# Altium PCB SPEC_A7_Management.PCBDOC (part 3 of 4)
Units mm, origin at the board's own origin, x right, y up, seen from the top; angles counter-clockwise.
Board outline 141.1 x 65.84 mm, 4 copper layers (Top Layer, Layer 1, Layer 2, Bottom Layer), stack 1.566 mm thick; 177 components, 176 nets, 698 pads, 409 vias.
Unrouted connection lines stored in the file: 4.
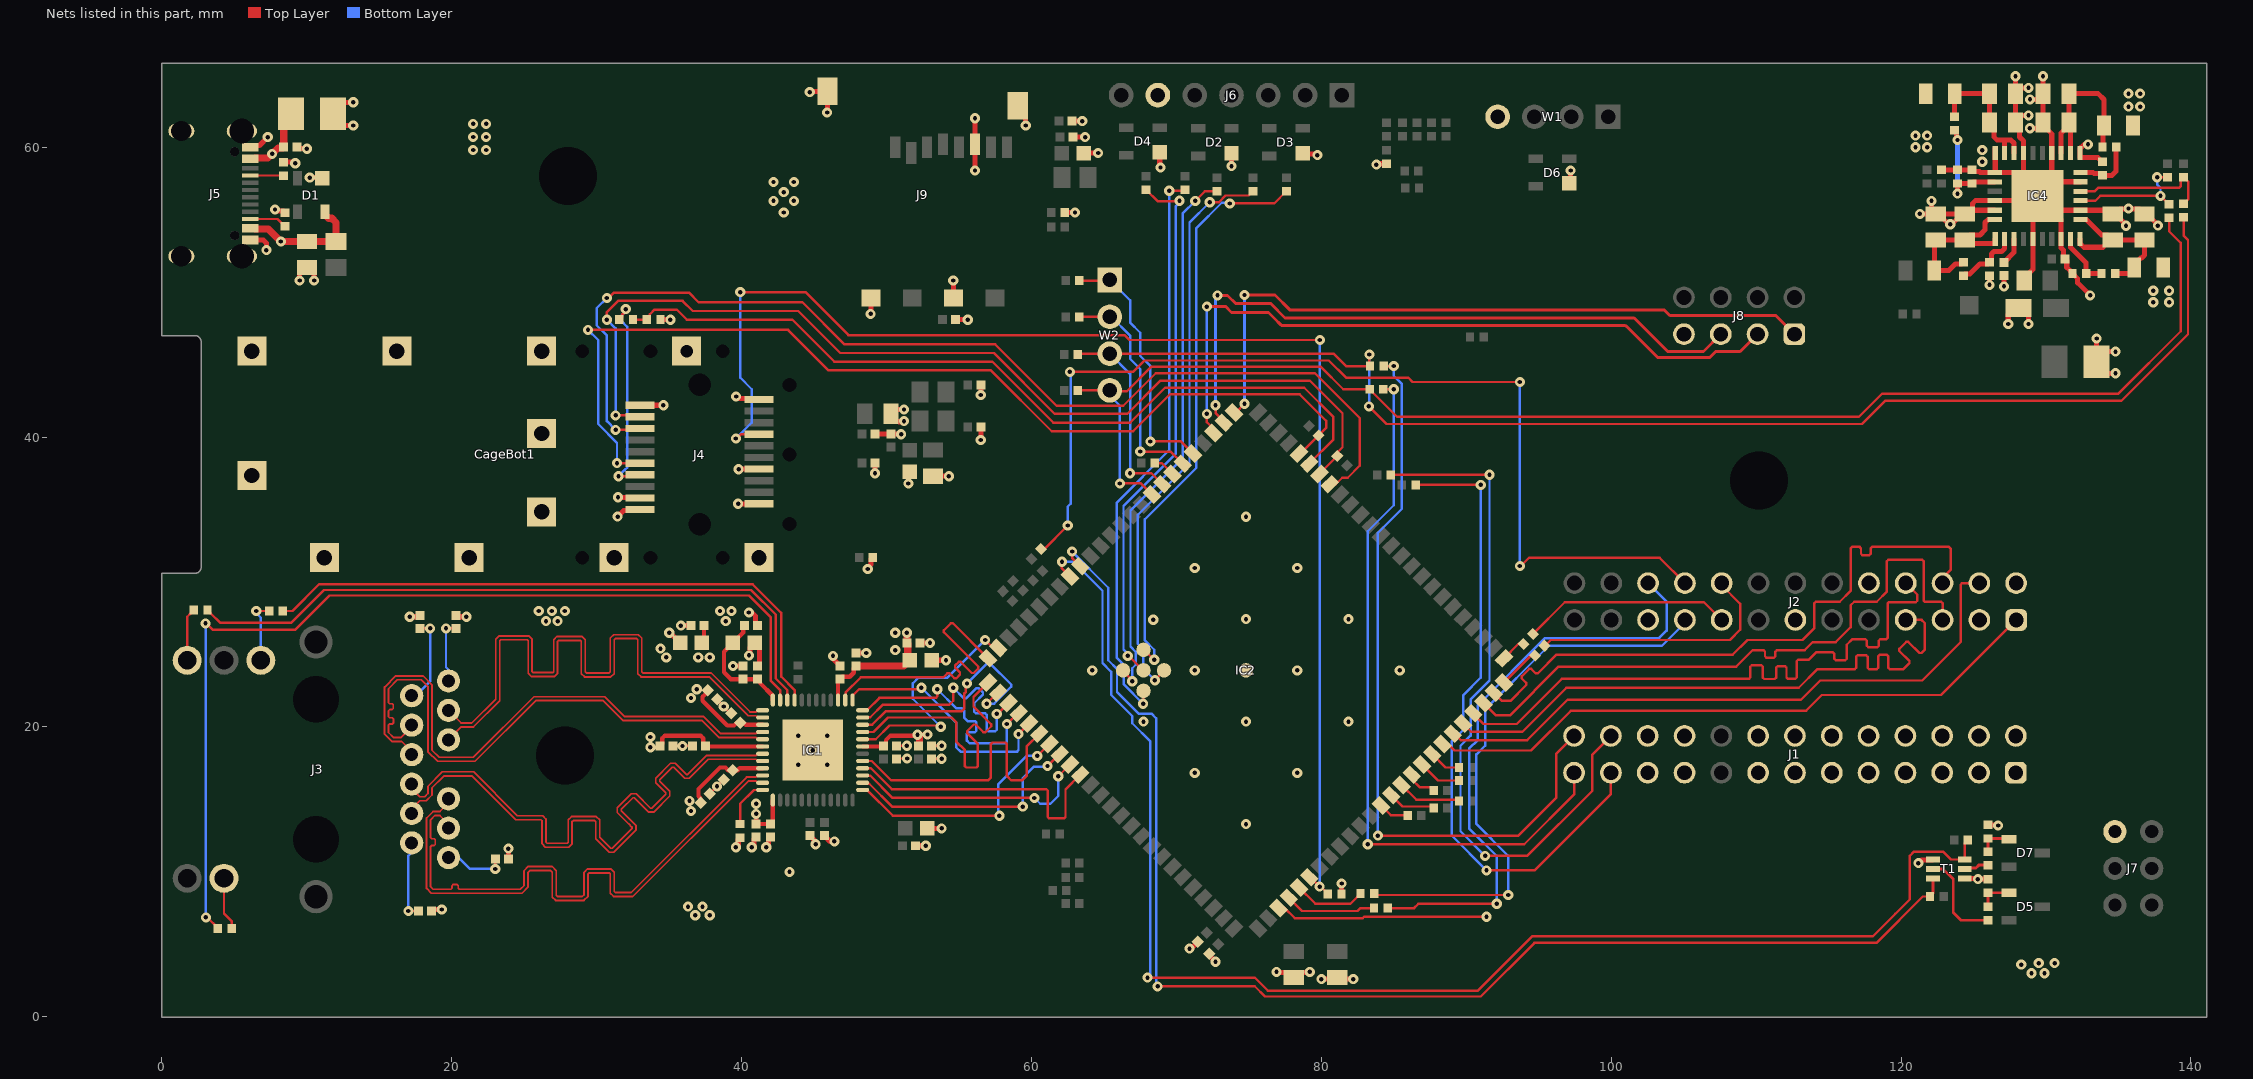
[diagram p4: the nets of this part, all layers, seen from the top]

## Via types
v1: diameter 0.7, hole 0.3, Top Layer to Bottom Layer, tented both sides, 409 vias

## Nets (pads, with @x,y where several pads share a name; then routed paths per layer and width w, separated by ;. In a path a pad name is that pad's centre, name@x,y a point inside that pad or via, vN(x,y) a via of type N, cw(c..) or ccw(c..) an arc to the next point about the centre after c; other vN are vias at no path point) (continued)
ENET1_RX_CLK: IC1.32 IC2.24 | length 17
  Top Layer w0.166: IC1.32@48.35,19.15 49.254,19.15 50.204,20.1 53.647,20.1 v1(53.739,20.008) ; v1(56.8,26) 57.362,25.438 IC2.24@57.706,25.438
  Bottom Layer w0.166: v1(53.739,20.008) 51.8,21.947 51.8,23 52.2,23.4 54.2,23.4 v1(56.8,26)
ENET1_RX_CTRL: IC1.38 IC2.25 | length 20
  Top Layer w0.166: IC1.38@47.15,21.85 47.176,21.876 47.176,22.374 48.227,23.425 53.917,23.425 54.192,23.701 54.33,23.701 54.677,23.354 54.814,23.354 55.067,23.606 55.067,23.744 54.72,24.09 54.72,24.228 54.976,24.484 55.113,24.484 55.88,23.718 56.018,23.718 56.326,24.026 56.326,24.164 53.957,26.532 53.957,26.67 54.44,27.152 54.577,27.152 IC2.25@56.999,24.731
ENET1_RXD0: IC1.33 IC2.26 | length 20.2
  Top Layer w0.166: IC1.33@48.35,19.65 49.09,19.65 50.092,20.653 54.477,20.653 54.8,20.329 54.8,18.997 55.4,18.397 55.4,17.3 55.5,17.2 56.2,17.2 56.3,17.3 56.3,18.823 55.555,19.568 55.555,19.706 56.014,20.165 56.152,20.165 56.68,19.637 56.817,19.637 57.221,20.041 57.221,20.179 56,21.4 56,22.071 IC2.26@56.999,23.069
ENET1_RXD1: IC1.34 IC2.27 | length 17
  Top Layer w0.166: IC1.34@48.35,20.15 49.003,20.15 49.926,21.073 55.179,21.073 55.37,21.264 55.37,22.314 55.453,22.397 55.453,22.907 v1(55.543,22.997) ; v1(56.9,21.6) 57.662,22.362 IC2.27@57.706,22.362
  Bottom Layer w0.166: v1(55.543,22.997) 56.963,24.417 57.101,24.417 58.6,22.917 58.6,22.78 57.421,21.6 v1(56.9,21.6)
ENET1_RXD2: IC1.35 IC2.28 | length 17
  Top Layer w0.166: IC1.35@48.35,20.65 48.363,20.663 48.869,20.663 49.742,21.536 54.333,21.536 54.6,21.802 v1(54.6,22.7) ; v1(57.6,20.9) 57.658,20.9 IC2.28@58.413,21.655
  Bottom Layer w0.166: v1@54.602,22.698 55.341,21.959 55.478,21.959 56.199,22.68 56.336,22.68 56.651,22.365 56.651,22.227 56.052,21.628 56.052,21.036 56.149,20.938 56.803,20.938 56.9,20.841 56.9,19.797 56.997,19.7 57.5,19.7 57.6,19.8 v1(57.6,20.9)
ENET1_RXD3: IC1.36 IC2.29 | length 17
  Top Layer w0.166: IC1.36@48.35,21.15 48.65,21.15 49.5,22 53.403,22 53.5,22.097 v1(53.5,22.6) ; v1(58.3,20.2) 59.048,20.948 IC2.29@59.12,20.948
  Bottom Layer w0.166: v1(53.5,22.6) 54.799,21.301 55.167,21.301 55.364,21.104 55.364,20.617 55.582,20.4 56.103,20.4 56.2,20.303 56.2,19.74 56.103,19.642 55.635,19.642 55.538,19.545 55.538,19.057 55.719,18.876 58.203,18.876 58.3,18.973 v1(58.3,20.2)
ENET1_TX_CLK: IC1.29 IC2.31 | length 20.1
  Top Layer w0.166: IC1.29@48.35,17.65 48.976,17.65 50.317,16.31 57,16.31 57.2,16.51 57.2,18.827 57.297,18.924 58.203,18.924 58.3,18.827 58.3,16.61 58.6,16.31 59.35,16.31 59.68,16.64 59.68,18.68 IC2.31@60.534,19.534
ENET1_TX_CTRL: IC1.37 IC2.30 | length 17
  Top Layer w0.166: IC1.37@47.65,21.85 47.65,22.15 48.1,22.6 52.3,22.6 v1(52.4,22.7) ; v1(59.1,19.5) 59.1,19.514 IC2.30@59.827,20.241
  Bottom Layer w0.166: v1(52.4,22.7) 54.8,20.3 54.8,18.6 55.1,18.3 59.003,18.3 59.1,18.397 v1(59.1,19.5)
ENET1_TXD0: IC1.28 IC2.35 | length 19.9
  Top Layer w0.166: IC1.28@48.35,17.15 48.912,17.15 50.358,15.704 61.022,15.704 61.119,15.607 61.119,13.785 61.217,13.688 62.245,13.688 62.343,13.785 62.343,15.685 IC2.35@63.363,16.705
ENET1_TXD1: IC1.27 IC2.34 | length 17
  Top Layer w0.166: IC1.27@48.35,16.65 48.363,16.637 48.869,16.637 50.407,15.099 60.199,15.099 v1(60.2,15.1) ; v1(61.843,16.6) IC2.34@62.655,17.412
  Bottom Layer w0.166: v1(60.2,15.1) 60.6,14.7 61.3,14.7 61.843,15.243 v1(61.843,16.6)
ENET1_TXD2: IC1.26 IC2.33 | length 17
  Top Layer w0.166: IC1.26@48.35,16.15 48.686,16.15 48.753,16.083 48.802,16.083 50.399,14.485 59.385,14.485 v1(59.4,14.5) ; v1(61.1,17.3) 61.919,18.119 IC2.33@61.948,18.119
  Bottom Layer w0.166: v1(59.4,14.5) 59.4,16.477 60.18,17.257 61.057,17.257 v1(61.1,17.3)
ENET1_TXD3: IC1.25 IC2.32 | length 17.1
  Top Layer w0.166: IC1.25@48.35,15.65 48.394,15.606 48.694,15.606 50.43,13.87 v1(57.783,13.87) ; v1(60.4,18) 61.227,18.827 IC2.32@61.241,18.827
  Bottom Layer w0.166: v1(57.783,13.87) 57.694,13.958 57.694,16.039 59.656,18 v1(60.4,18)
ENET2_MDC: IC2.76 R62.2 | length 2.2
  Top Layer w0.166: IC2.76@92.592,24.308 92.592,24.721 93.606,25.735 93.614,25.735 93.629,25.749 93.921,25.749 R62.2@93.935,25.735
ENET2_MDIO: IC2.75 R61.2 | length 3.3
  Top Layer w0.166: IC2.75@93.014,23.069 IC2.75@92.601,23.069 94.468,24.935 R61.2@94.735,24.935
ENET2_RX_CLK: IC2.70 J2.4 | length 43.3
  Top Layer w0.166: IC2.70@89.066,19.534 89.172,19.534 89.615,19.09 94.211,19.09 96.993,21.872 113.099,21.872 114.428,23.2 121.46,23.2 124.121,25.861 124.121,29.824 124.218,29.921 J2.4@125.405,29.921
ENET2_RX_CTRL: IC2.69 J2.1 | length 43.5
  Top Layer w0.166: IC2.69@88.359,18.827 88.738,18.827 89.19,18.374 94.477,18.374 97.22,21.116 113.45,21.116 114.533,22.2 122.764,22.2 J2.1@127.945,27.381
ENET2_RXD0: IC2.74 J2.6 | length 43.5
  Top Layer w0.166: IC2.74@91.894,22.362 92.456,21.8 93.045,21.8 94.141,22.897 94.141,23.034 93.831,23.345 93.831,23.483 94.349,24.001 94.486,24.001 94.797,23.69 94.935,23.69 96.236,24.991 108.391,24.991 109.4,26 113.2,26 114.021,26.821 114.021,28.543 114.118,28.64 115.771,28.64 116.521,29.39 116.521,32.323 116.618,32.421 117.142,32.421 117.24,32.323 117.24,31.952 117.337,31.854 117.803,31.854 117.9,31.952 117.9,32.321 118,32.421 123.313,32.421 123.419,32.315 123.419,30.836 122.865,30.282 J2.6@122.865,29.921
ENET2_RXD1: IC2.73 J2.5 | length 43.4
  Top Layer w0.166: IC2.73@91.187,21.655 92.042,20.8 93.009,20.8 96.373,24.164 108.627,24.164 109.753,25.29 110.518,25.29 110.616,25.192 110.616,24.881 110.713,24.783 111.231,24.783 111.328,24.881 111.328,25.192 111.425,25.29 113.348,25.29 113.898,25.84 115.483,25.84 116.521,26.878 116.521,28.393 116.768,28.64 118.321,28.64 119.021,29.34 119.021,31.435 119.118,31.533 121.465,31.533 121.562,31.435 121.562,28.724 121.66,28.627 122.768,28.627 122.865,28.53 J2.5@122.865,27.381
ENET2_RXD2: IC2.72 J2.8 | length 43.3
  Top Layer w0.166: IC2.72@90.48,20.948 90.48,20.909 91.185,20.204 93.484,20.204 96.593,23.313 109.503,23.313 109.6,23.41 109.6,24.158 109.697,24.255 110.365,24.255 110.463,24.158 110.463,23.402 110.56,23.304 111.284,23.304 111.381,23.402 111.381,24.091 111.479,24.188 112,24.188 112.097,24.091 112.097,23.413 112.195,23.316 112.703,23.316 112.8,23.413 112.8,24.526 112.897,24.624 113.613,24.624 114.13,25.14 115.306,25.14 115.403,25.043 115.403,24.697 115.5,24.6 116.156,24.6 116.253,24.697 116.253,25.674 116.619,26.04 117.546,26.04 117.643,25.943 117.643,25.597 117.741,25.5 118.367,25.5 118.464,25.597 118.464,25.943 118.561,26.04 118.976,26.04 119.074,26.137 119.074,28.515 119.171,28.612 121.017,28.612 121.114,28.71 121.114,29.132 J2.8@120.325,29.921
ENET2_RXD3: IC2.71 J2.7 | length 43.3
  Top Layer w0.166: IC2.71@89.773,20.241 90.347,19.666 93.873,19.666 96.907,22.7 112.943,22.7 114.231,23.987 116.8,23.987 116.897,24.085 116.897,24.852 116.994,24.949 117.597,24.949 117.694,24.852 117.694,24.085 117.791,23.987 118.317,23.987 118.414,24.085 118.414,24.87 118.512,24.967 119.027,24.967 119.125,24.87 119.125,24.085 119.222,23.987 120.167,23.987 120.587,24.407 120.587,24.545 119.882,25.25 119.882,25.388 120.364,25.87 120.502,25.87 121.268,25.103 121.406,25.103 121.65,25.348 121.65,27.15 121.419,27.381 J2.7@120.325,27.381
  Bottom Layer w0.166: J2.7@120.325,27.381 J2.7@120.336,27.371
ENET2_TX_CLK: IC2.63 R70.2 | length 2.1
  Top Layer w0.166: IC2.63@84.116,14.584 84.8,13.9 R70.2@85.96,13.9
ENET2_TX_CTRL: IC2.68 R69.2 | length 2.2
  Top Layer w0.166: IC2.68@87.652,18.119 88.571,17.2 R69.2@89.5,17.2
ENET2_TXD0: IC2.67 R60.2 | length 3
  Top Layer w0.166: IC2.67@86.945,17.412 88.057,16.3 R60.2@89.5,16.3
ENET2_TXD1: IC2.66 R66.2 | length 2.2
  Top Layer w0.166: IC2.66@86.237,16.705 86.237,16.386 86.796,15.827 87.553,15.827 87.76,15.62 R66.2@87.76,15.6
ENET2_TXD2: IC2.65 R67.2 | length 4.4
  Top Layer w0.166: IC2.65@85.53,15.998 86.549,14.98 89.42,14.98 R67.2@89.5,14.9
ENET2_TXD3: IC2.64 R68.2 | length 3.3
  Top Layer w0.166: IC2.64@84.823,15.291 85.604,14.51 87.65,14.51 R68.2@87.76,14.4
EXT_CLK_0_N: J1.4
EXT_CLK_0_P: J1.1
EXT_CLK_1_N: J1.5
EXT_CLK_1_P: J1.6
EXT_CLK_4_N: J1.22
EXT_CLK_4_P: J1.19
EXT_CLK_5_N: J1.16
EXT_CLK_5_P: J1.13
EXT_CLK_6_N: J1.10
EXT_CLK_6_P: J1.7
EXT_CLK_9_N: J1.11
EXT_CLK_9_P: J1.12
FLASH_UP_EN: IC2.3 J8.3 | length 49
  Top Layer w0.166: v1(72.1,41.6) 72.1,41.025 72.555,40.57 IC2.3@72.555,40.287
  Top Layer w0.2: v1(72.1,49) 73.4,49 73.8,48.6 76.35,48.6 76.776,48.174 77.202,47.748 77.26,47.69 100.927,47.69 cw(c100.927,47.49) 101.069,47.631 103.209,45.491 106.8,45.491 107.208,45.9 108.9,45.9 J8.3@110.1,47.1
  Bottom Layer w0.166: v1(72.1,41.6) v1(72.1,49)
FPGA_DONE: IC2.2 J8.5 | length 45.9
  Top Layer w0.166: v1(72.7,42.2) 72.7,41.651 73.262,41.089 IC2.2@73.262,40.994
  Top Layer w0.2: v1(72.838,49.775) 73.525,49.775 74.092,49.208 76.508,49.208 77.501,48.215 101.585,48.215 103.9,45.9 106.36,45.9 J8.5@107.56,47.1
  Bottom Layer w0.2: v1(72.7,42.2) 72.7,49.501 72.838,49.64 v1(72.838,49.775)
FPGA_INIT_B: IC2.1 J8.1 | length 47.6
  Top Layer w0.166: IC2.1@73.969,41.701 74.101,41.701 v1(74.7,42.3)
  Top Layer w0.2: v1(74.697,49.808) 76.792,49.808 77.818,48.782 103.648,48.782 104.046,48.383 111.357,48.383 J8.1@112.64,47.1
  Bottom Layer w0.2: v1(74.697,49.808) 74.7,49.805 v1(74.7,42.3)
GND: C1.1 C2.1 C3.1 C4.1 C5.1 C6.1 C7.1 C8.1 C9.1 C10.1 C11.1 C12.1 C13.1 C14.1 C15.1 C16.1 C17.1 C18.1 C19.1 C20.1 C21.1 C22.1 C23.1 C24.1 C25.1 C26.1 C27.1 C28.1 C29.1 C30.1 C31.1 C32.1 C33.1 C34.1 C35.1 C36.1 C37.1 C38.1 C39.1 C40.1 C41.2 C42.1 C43.1 C44.1 C45.1 C46.1 C47.1 C48.1 C49.2 C50.2 C51.1 C52.1 C53.1 C54.1 C55.1 C56.1 C57.1 C58.1 C59.1 C60.1 C61.1 C62.1 CageBot1.21 CageBot1.22 CageBot1.23 CageBot1.24 CageBot1.25 CageBot1.26 CageBot1.27 CageBot1.28 CageBot1.29 CageBot1.30 CageBot1.31 D1.1 D2.1 D3.1 D4.1 D6.1 IC1.49 IC2.101 IC4.2 IC4.5 IC4.7 IC4.10 IC4.13 IC4.16 IC4.17 IC4.20 IC4.21 IC4.27 IC4.30 IC4.33 J1.2 J1.3 J1.8 J1.9 J1.14 J1.15 J1.20 J1.21 J2.2 J2.3 J2.10 J2.13 J2.21 J4.1 J4.9 J4.10 J4.11 J4.14 J4.20 J5.1 J5.2 J5.3 J5.4 J5.A1-B12 J5.B1-A12 J6.6 J7.6 J8.7 J9.6 J9.9 R5.2 R10.1 R11.1 R12.1 R13.2 R14.2 R33.1 R39.1 R40.1 R41.1 R46.1 R49.1 R52.1 R74.1 R77.1 R78.2 T1.1 T1.4 W1.4 | length 168.7
  Top Layer w0.166: C8.1@35.25,18.7 35.263,18.687 v1(35.918,18.687) 36.587,18.687 C17.1@36.6,18.7 ; C26.1@37.8,15.4 v1(38.3,15.9) C20.1@38.764,16.364 ; C25.1@38.3,21.9 38.3,21.874 v1(38.762,21.412) 39.238,20.936 C19.1@39.264,20.936 ; C5.1@50.7,17.8 50.72,17.82 v1(51.42,17.82) ; C9.1@50.7,18.7 v1(51.4,18.7) ; C12.1@53.1,17.8 v1(53.8,17.8) ; C18.1@53.1,18.7 v1(53.8,18.7)
  Top Layer w0.35: J5.B1-A12@6.09,53.6 6.995,53.6 7.2,53.395 v1(7.2,52.9) ; J5.A1-B12@6.09,60 6.215,60.125 6.725,60.125 v1(7.3,60.7) ; v1(7.8,55.7) 7.905,55.595 8.385,55.595 R13.2@8.5,55.48 ; R14.2@8.4,58.97 9.13,58.97 v1(9.2,58.9) ; C40.1@9.3,60 9.4,59.9 v1(10,59.9) ; v1(9.5,50.8) 9.5,51.35 9.85,51.7 C39.1@10,51.7 10.15,51.7 10.5,51.35 v1(10.5,50.8) ; v1(10.2,57.9) 11,57.9 D1.1@11.05,57.85 ; v1(13.2,61.5) 12.525,61.5 11.8,62.225 C41.2@11.8,62.3 11.8,62.375 12.525,63.1 v1(13.2,63.1) ; v1(17.1,27.6) 17.7,27.6 C2.1@17.8,27.7 ; C3.1@18.6,7.3 18.7,7.4 v1(19.3,7.4) ; C1.1@20.3,27.7 20.4,27.6 v1(21,27.6) ; C4.1@23.9,10.9 v1(23.9,11.6) ; v1(31.441,34.51) 31.852,34.92 32.925,34.92 J4.10@33,34.995 ; v1(31.469,35.845) 31.494,35.82 32.975,35.82 J4.9@33,35.795 ; J4.1@33,42.195 33.002,42.198 34.598,42.198 v1(34.6,42.2) v1@34.605,42.195 ; R12.1@34.4,48.1 v1(35.08,48.1) ; v1(35,26.5) 35.05,26.5 C23.1@35.75,25.8 ; v1(35.803,26.989) 35.809,26.994 36.494,26.994 C24.1@36.5,27 ; v1(39.4,24.2) C29.1@40.1,24.2 ; v1(39.6,11.7) 39.765,11.865 39.765,12.245 39.88,12.36 R5.2@39.9,12.36 ; v1(39.617,42.802) 39.712,42.802 39.844,42.67 41.125,42.67 J4.20@41.2,42.595 ; v1(39.753,35.395) J4.11@41.774,35.395 ; v1(39.791,37.776) 39.801,37.785 41.19,37.785 J4.14@41.2,37.795 ; v1(40.5,27.9) 40.7,27.9 40.965,27.635 40.965,27.135 C28.1@41.1,27 ; v1(40.511,24.937) 40.575,25.002 40.575,25.475 C27.1@40.9,25.8 41.225,25.475 41.225,25.288 41.243,25.27 41.243,24.343 C21.1@41.1,24.2 ; v1(40.7,11.7) 40.865,11.865 40.865,12.265 C30.1@41,12.4 ; v1(41.7,11.7) 41.865,11.865 41.865,12.265 C22.1@42,12.4 ; C6.1@44.7,12.5 44.835,12.365 44.957,12.243 cw(c44.617,11.9) v1(45.1,11.9) ; v1(44.7,63.8) 44.75,63.85 J9.9@45.92,63.85 45.92,62.42 v1(45.9,62.4) ; C13.1@45.7,12.5 46.1,12.1 v1(46.4,12.1) ; v1(46.3,24.9) 46.367,24.833 46.367,24.633 C7.1@46.8,24.2 ; C16.1@47.9,25.1 v1(48.6,25.1) ; v1(48.7,30.9) 48.7,30.995 48.925,31.22 48.925,31.585 R11.1@49.04,31.7 ; v1(48.9,48.5) 48.92,48.52 J9.9@48.92,49.6 ; v1(49.2,37.5) C33.1@49.2,38.2 ; C38.1@49.2,40.2 C36.1@50.3,40.2 v1(51,40.2) ; v1(51.2,41.1) 51.145,41.045 50.855,41.045 50.825,41.075 50.65,41.075 50.3,41.425 C37.1@50.3,41.6 50.6,41.9 v1(51.2,41.9) ; v1(51.5,36.8) 51.5,37.5 C35.1@51.6,37.6 ; C11.1@52,11.8 v1(52.7,11.8) ; C15.1@52.3,25.8 v1(53,25.8) ; C10.1@52.8,13 v1(53.8,13) ; C14.1@53.1,24.6 v1(54.1,24.6) ; C32.1@53.2,37.3 v1(54.3,37.3) ; v1(54.6,50.8) 54.62,50.78 J9.9@54.62,49.6 ; C62.1@54.75,48.1 v1(55.6,48.1) ; v1(56.1,58.4) v1(56.1,62) ; v1(56.5,39.8) C34.1@56.5,40.7 ; v1(56.5,42.9) C31.1@56.5,43.6 ; J9.9@59.05,62.85 59.575,62.325 59.575,61.525 v1(59.6,61.5) ; R78.2@62.3,55.5 v1(63,55.5) ; C61.1@62.8,61.8 v1(63.5,61.8) ; C60.1@62.85,60.7 v1(63.7,60.7) ; C42.1@63.6,59.6 v1(64.6,59.6) ; D4.1@68.85,59.65 68.85,58.65 v1(68.9,58.6) ; v1(70.9,4.7) 71,4.7 C43.1@71.464,5.164 ; C44.1@72.264,4.364 72.264,4.236 v1(72.7,3.8) ; v1(73.8,58.7) D2.1@73.8,59.6 ; v1(76.9,3.1) 76.95,3.05 77.75,3.05 C45.1@78.1,2.7 78.275,2.7 78.625,3.05 79.15,3.05 v1(79.2,3.1) ; D3.1@78.7,59.6 78.779,59.521 79.66,59.521 v1(79.727,59.454) ; v1(80,2.6) v1(82.2,2.6) ; R10.1@81.389,8.467 81.4,8.477 v1(81.4,9.2) ; v1(83.8,58.8) 83.86,58.86 R33.1@84.5,58.86 ; D6.1@97.1,57.5 97.2,57.6 v1(97.2,58.4) ; v1(121.2,10.6) 121.425,10.825 122.175,10.825 T1.1@122.2,10.85 ; v1(121.3,55.4) C57.1@122.4,55.4 ; v1(122.1,56.3) 122.1,55.7 C57.1@122.4,55.4 ; R41.1@122.8,58.44 R39.1@123.9,58.44 R40.1@124.9,58.44 125.015,58.325 125.395,58.325 125.45,58.27 IC4.17@126.462,58.27 IC4.17@126.5,58.27 ; T1.4@124.4,9.55 125.25,9.55 v1(125.3,9.5) R74.1@126,9.5 ; C58.1@124.487,55.487 124.654,55.654 C58.1@124.829,55.654 ; R77.1@126,13.24 126.66,13.24 v1(126.7,13.2) ; v1(126.1,50.5) R52.1@126.1,51.13 ; IC4.21@126.462,55.654 C58.1@124.829,55.654 ; IC4.16@126.5,59.913 IC4.16@126.5,59.6 IC4.17@126.5,58.27 ; v1(127.1,50.4) C59.1@127.1,51.15 ; v1(127.4,47.8) 127.4,48.45 127.85,48.9 C50.2@128.1,48.9 128.35,48.9 128.8,48.45 v1(128.8,47.8) ; v1(127.9,64.9) C48.1@127.9,63.75 ; C51.1@128.5,50.8 128.5,50.975 129.1,51.575 IC4.27@129.1,53.675 IC4.33@129.1,56.312 ; v1(128.8,62.2) 128.25,62.2 C47.1@127.9,61.85 ; v1(128.8,64.1) 128.25,64.1 C48.1@127.9,63.75 ; v1(128.887,61.308) 129.45,61.308 C53.1@129.8,61.658 ; v1(128.9,63.3) 129.45,63.3 C54.1@129.8,63.65 ; v1(129.8,64.9) C54.1@129.8,63.7 C54.1@129.8,63.65 ; IC4.5@132.387,57.62 130.408,57.62 IC4.33@130.4,57.612 ; v1(132.9,60.2) 132.637,60.2 132.35,59.912 IC4.7@132.35,59.6 132.35,59.3 133.58,59.3 133.88,59 R46.1@133.9,59 ; v1(133.049,49.781) 132.185,50.644 132.185,50.925 131.83,51.28 R49.1@131.83,51.3 131.83,51.32 131.435,51.715 131.435,52.165 C52.1@131.3,52.3 131.2,52.4 131.2,52.9 131.05,53.05 IC4.30@131.05,53.675 131.05,55.012 IC4.33@130.408,55.654 ; v1(133.5,46.8) C49.2@133.5,45.2 ; v1(134.8,44.4) 134.225,44.4 133.5,45.125 C49.2@133.5,45.2 ; v1(134.8,45.9) 134.2,45.9 C49.2@133.5,45.2 ; v1(135.523,54.584) 135.523,54.652 C55.1@134.775,55.4 ; v1(137.721,54.593) 137.721,54.654 136.975,55.4 C56.1@136.8,55.4 136.45,55.75 135.713,55.75 v1(135.692,55.771) 135.671,55.75 135.125,55.75 C55.1@134.775,55.4 ; C57.1@122.4,55.4 C57.1@122.575,55.4 ; C57.1@122.575,55.4 C58.1@124.225,55.4 ; C57.1@122.575,55.4 123.224,54.751 123.334,54.751 v1(123.401,54.684) 123.468,54.751 123.576,54.751 C58.1@124.225,55.4 ; C58.1@124.225,55.4 C58.1@124.4,55.4 124.575,55.4 C58.1@124.829,55.654 ; C58.1@124.829,55.654 124.925,55.75 124.925,56.107 125.13,56.312 IC4.20@126.462,56.312 IC4.33@129.1,56.312 ; IC4.17@126.5,58.27 127.792,58.27 IC4.33@128.45,57.612 ; C47.1@127.9,61.85 C48.1@127.9,63.7 C48.1@127.9,63.75 ; C47.1@127.9,61.85 C47.1@127.9,61.7 128.18,61.42 128.18,60.712 128.45,60.442 IC4.13@128.45,59.6 IC4.33@128.45,57.612 ; IC4.33@128.45,57.612 IC4.33@129.425,56.637 ; IC4.33@129.1,56.312 IC4.33@129.425,56.637 ; IC4.33@129.425,56.637 IC4.33@130.4,57.612 ; IC4.33@129.425,56.637 IC4.33@130.408,55.654 ; C53.1@129.8,61.658 129.8,61.525 130.4,60.925 IC4.10@130.4,59.6 IC4.33@130.4,57.612 ; C53.1@129.8,61.658 C53.1@129.8,61.7 C54.1@129.8,63.65 ; IC4.33@130.408,55.654 IC4.2@132.387,55.654 134.345,55.654 C55.1@134.6,55.4 C55.1@134.775,55.4
  other v1: 43.3,10 74.8,13.293 71.264,16.829 78.336,16.829 43.9,17.4 45.9,17.4 44.9,18.4 43.9,19.4 45.9,19.4 67.729,20.364 74.8,20.364 81.871,20.364 64.193,23.9 71.264,23.9 78.336,23.9 85.407,23.9 68.4,27.4 74.8,27.436 81.871,27.436 71.264,30.971 78.336,30.971 74.8,34.507 125.6,59 125.6,59.8
GPIO0: J2.18 R61.1 | length 17.7
  Top Layer w0.166: R61.1@95.4,25.6 95.428,25.6 95.828,26 108.2,26 108.9,26.7 108.9,28.5 107.625,29.775 J2.18@107.625,29.921
GPIO1: J2.17 R62.1 | length 14.4
  Top Layer w0.166: R62.1@94.6,26.4 96.8,28.6 106.406,28.6 J2.17@107.625,27.381
GPIO2: J2.20 R63.1 | length 70.2
  Top Layer w0.166: R63.1@60.681,32.251 60.851,32.251 v1(62.5,33.9) ; v1(62.647,44.5) 67,44.5 67.785,45.285 80.515,45.285 81.7,44.1 86,44.1 86.3,43.8 v1(93.7,43.8) ; v1(93.7,31.1) 93.764,31.1 94.334,31.67 103.337,31.67 J2.20@105.085,29.921
  Bottom Layer w0.166: v1(62.5,33.9) 62.5,35.2 62.7,35.4 62.7,44.447 v1(62.647,44.5) ; v1(93.7,31.1) v1(93.7,43.8)
GPIO3: J2.19 R64.1 | length 39.7
  Top Layer w0.166: R64.1@83.64,8.5 83.74,8.4 v1(92.9,8.4)
  Bottom Layer w0.166: v1(92.9,8.4) 92.9,11.1 90.7,13.3 90.7,18.1 91.3,18.7 91.3,21.206 95.693,25.599 103.499,25.599 105.085,27.184 J2.19@105.085,27.381
GPIO4: J2.22 R65.1 | length 41.3
  Top Layer w0.166: R65.1@84.57,7.5 86.4,7.5 86.7,7.8 v1(92.1,7.8)
  Bottom Layer w0.166: v1(92.1,7.8) 92.1,11.1 90.2,13 90.2,18.5 90.8,19.1 90.8,21.5 95.426,26.126 103.305,26.126 103.821,26.642 103.821,28.645 J2.22@102.545,29.921
GPIO5: J1.24 R26.1 | length 48.2
  Top Layer w0.166: R26.1@84.8,37.4 v1(91.6,37.4) ; v1(91.3,11.1) 94.2,11.1 98.7,15.6 98.7,18.099 J1.24@99.981,19.38
  Bottom Layer w0.166: v1(91.3,11.1) 89.6,12.8 89.6,18.7 90.3,19.4 90.3,21.9 91.6,23.2 v1(91.6,37.4)
GPIO6: J1.23 R59.1 | length 45.2
  Top Layer w0.166: R59.1@86.5,36.7 v1(91,36.7) ; v1(91.4,10.1) 94.7,10.1 99.981,15.381 J1.23@99.981,16.84
  Bottom Layer w0.166: v1(91,36.7) 91,23.4 89.8,22.2 89.8,19.8 89,19 89,12.5 v1(91.4,10.1)
GPIO112: IC2.17 R72.1 T1.6 | length 97.2
  Top Layer w0.166: v1(62.1,31.4) 62.1,30.943 IC2.17@62.655,30.388 ; v1(68,2.7) 75.4,2.7 76.3,1.8 90.8,1.8 94.547,5.547 118.047,5.547 119.6,7.1 120.6,8.1 120.6,11.1 120.9,11.4 122.9,11.4 123.45,10.85 T1.6@124.4,10.85 124.4,11.98 124.6,12.18 R72.1@124.6,12.2
  Bottom Layer w0.166: v1(62.1,31.4) 62.9,31.4 64.9,29.4 64.9,24.4 65.5,23.8 65.5,22.2 66.95,20.75 66.95,20.25 68.2,19 68.2,2.9 v1(68,2.7)
GPIO114: IC2.16 R75.1 T1.3 | length 92
  Top Layer w0.166: v1(62.8,32.1) 62.8,31.657 IC2.16@63.363,31.095 ; v1(68.7,2.1) 75.4,2.1 76.1,1.4 91,1.4 94.7,5.1 118.3,5.1 121.5,8.3 R75.1@122,8.3
  Top Layer w0.2: R75.1@122,8.3 122,8.32 122.2,8.52 T1.3@122.2,9.55
  Bottom Layer w0.166: v1(62.8,32.1) 65.3,29.6 65.3,24.6 65.9,24 65.9,22.4 67.383,20.917 68.283,20.917 68.6,20.6 68.6,2.197 68.697,2.1 v1(68.7,2.1)
GPIO200: IC2.94 J4.2 R7.1 | length 70.2
  Top Layer w0.166: v1(30.7,48.1) 30.7,48.633 31.467,49.4 35.925,49.4 36.625,48.7 43.9,48.7 46.8,45.8 57.4,45.8 61.6,41.6 66.606,41.6 68.906,43.9 79.201,43.9 81.457,41.644 81.457,39.295 81.1,38.939 R7.1@81.1,38.7 79.873,37.473 IC2.94@79.873,37.459 ; v1(31.3,41.5) 32.895,41.5 J4.2@33,41.395
  Bottom Layer w0.166: v1(30.7,48.1) 31.3,47.5 v1(31.3,41.5)
GPIO201: IC2.93 J4.3 | length 75.1
  Top Layer w0.166: v1(30.7,49.6) 30.814,49.6 31.181,49.967 36.357,49.967 37.023,49.3 44.2,49.3 47.1,46.4 57.5,46.4 61.733,42.167 66.335,42.167 68.568,44.4 79.561,44.4 82.653,41.308 82.653,38.03 81.82,37.197 81.439,37.197 80.993,36.752 IC2.93@80.581,36.752 ; v1(31.3,40.5) 32.905,40.5 J4.3@33,40.595
  Bottom Layer w0.166: v1(30.7,49.6) 30,48.9 30,47.7 30.7,47 30.7,41.1 v1(31.3,40.5)
GPIO202: IC2.96 J4.6 R8.1 | length 70.4
  Top Layer w0.166: v1(29.4,47.4) 43.2,47.4 46,44.6 57.2,44.6 61.4,40.4 67.006,40.4 69.56,42.953 78.501,42.953 80.325,41.129 80.325,40.625 R8.1@79.8,40.1 78.573,38.873 IC2.96@78.459,38.873 ; v1(31.4,38.2) 32.995,38.2 J4.6@33,38.195
  Bottom Layer w0.166: v1(29.4,47.4) 30.1,46.7 30.1,40.9 31.4,39.6 v1(31.4,38.2)
GPIO203: IC2.95 R9.2 R12.2 | length 57.7
  Top Layer w0.166: R9.2@32.5,48.1 R12.2@33.46,48.1 33.667,48.307 33.667,48.478 33.989,48.8 35.522,48.8 36.222,48.1 43.5,48.1 46.4,45.2 57.3,45.2 61.5,41 66.816,41 69.216,43.4 78.821,43.4 80.83,41.391 80.83,39.829 IC2.95@79.166,38.166
GPIO300: IC2.56 J4.17 R10.2 | length 93.5
  Top Layer w0.166: v1(39.6,39.9) 39.656,39.9 39.951,40.195 J4.17@41.2,40.195 ; v1(39.9,50) 44.4,50 47.368,47.032 66.422,47.032 66.754,46.7 v1(79.9,46.7) ; IC2.56@79.166,9.634 79.231,9.634 v1(79.883,8.982) 79.954,8.982 80.449,8.487 R10.2@80.449,8.467
  Bottom Layer w0.166: v1(39.6,39.9) 40.7,41 40.7,43.3 39.9,44.1 v1(39.9,50) ; v1(79.883,8.982) 79.891,8.991 79.891,46.691 v1(79.9,46.7)
GPIO301: IC2.54 R65.2 | length 6.3
  Top Layer w0.166: IC2.54@77.752,8.22 78.672,7.3 82.5,7.3 82.7,7.5 R65.2@83.63,7.5
GPIO302: IC2.55 R64.2 | length 5
  Top Layer w0.166: IC2.55@78.459,8.927 79.586,7.8 82,7.8 82.473,8.273 82.493,8.273 82.7,8.48 R64.2@82.7,8.5
GPIO303: IC2.53 | length 14.7
  Top Layer w0.166: IC2.53@77.045,7.513 77.458,7.513 78.171,6.8 82.85,6.8 82.95,6.9 v1(91.4,6.9)
I2C_SCL: J1.25 R15.1 | length 50
  Top Layer w0.166: v1(83.2,11.9) 94,11.9 97.441,15.341 J1.25@97.441,16.84 ; R15.1@84.27,43.3 v1(85,43.3)
  Bottom Layer w0.166: v1(83.2,11.9) 83.2,33.5 85,35.3 v1(85,43.3)
I2C_SDA: J1.26 R16.1 | length 52.2
  Top Layer w0.166: v1(83.9,12.5) 93.6,12.5 96.2,15.1 96.2,18.139 J1.26@97.441,19.38 ; R16.1@84.3,44.9 v1(85,44.9)
  Bottom Layer w0.166: v1(83.9,12.5) 83.9,33.4 85.553,35.053 85.553,43.665 85,44.218 v1(85,44.9)
I2CA_SCL: IC2.5 R22.2 W2.1 | length 17.7
  Top Layer w0.166: R22.2@63.3,50.8 65.36,50.8 W2.1@65.4,50.84 ; v1(68.2,39.7) 70.314,39.7 IC2.5@71.141,38.873
  Bottom Layer w0.166: W2.1@65.4,50.84 66.8,49.44 66.8,47.9 67.5,47.2 67.5,45.6 68.2,44.9 v1(68.2,39.7)
I2CA_SDA: IC2.6 R20.2 W2.2 | length 15.6
  Top Layer w0.166: R20.2@63.3,48.3 W2.2@65.4,48.3 ; v1(67.501,39.004) 67.505,39 69.599,39 IC2.6@70.434,38.166
  Bottom Layer w0.166: W2.2@65.4,48.3 65.5,48.3 66.8,47 66.8,45.4 67.5,44.7 v1@67.5,39.005
I2CB_SCL: IC2.8 R16.2 R19.2 R45.1 W2.3 | length 104.1
  Top Layer w0.166: R19.2@63.2,45.7 63.26,45.76 80.844,45.76 81.704,44.9 R16.2@83.36,44.9 83.31,44.95 v1(83.31,45.701) ; v1(66.8,37.5) 68.271,37.5 IC2.8@69.019,36.752 ; v1(83.282,42.12) 84.502,40.9 117.3,40.9 118.9,42.5 135.2,42.5 139.8,47.1 139.8,53.6 139.5,53.9 R45.1@139.5,55.16
  Bottom Layer w0.166: W2.3@65.4,45.76 66.8,44.36 v1(66.8,37.5) ; v1(83.282,42.12) 83.296,42.134 83.296,45.687 v1(83.31,45.701)
I2CB_SDA: IC2.9 R15.2 R17.2 R42.1 W2.4 | length 98.1
  Top Layer w0.166: R17.2@63.2,43.2 63.22,43.22 W2.4@65.4,43.22 65.456,43.164 66.58,43.164 68.257,44.841 79.971,44.841 81.512,43.3 R15.2@83.33,43.3 85.23,41.4 117.1,41.4 118.7,43 135,43 139.3,47.3 139.3,53.398 138.5,54.198 R42.1@138.5,55.13 ; v1(66.1,36.8) 67.557,36.8 IC2.9@68.312,36.045
  Bottom Layer w0.166: W2.4@65.4,43.22 65.4,42.861 66.1,42.161 v1(66.1,36.8)
JTAG_TCK: IC2.C3 R53.2 | length 39.7
  Top Layer w0.166: v1(67.7,21.6) 67.729,21.629 IC2.C3@67.729,22.486 ; v1(69.5,57) 70.54,57 R53.2@70.6,57.06
  Bottom Layer w0.166: v1(67.7,21.6) 66.374,22.926 66.374,24.275 65.889,24.76 65.889,35.489 69.5,39.1 v1(69.5,57)
JTAG_TDI: IC2.C1 R55.2 | length 39.8
  Top Layer w0.166: v1(68.516,23.218) 68.516,23.245 69.143,23.873 IC2.C1@69.143,23.9 ; v1(72.3,56.2) 72.927,56.2 73.398,56.67 74.99,56.67 75.28,56.96 R55.2@75.3,56.96
  Bottom Layer w0.166: v1(68.516,23.218) 67.707,24.027 67.707,25.376 67.331,25.751 67.331,34.631 70.899,38.199 70.899,54.799 v1(72.3,56.2)
JTAG_TDO: IC2.B2 R54.1 | length 37.3
  Top Layer w0.166: v1(66.64,24.904) 66.711,24.904 67.714,23.9 IC2.B2@67.729,23.9 ; R54.1@67.9,57.06 67.92,57.06 68.718,56.262 70.162,56.262 v1(70.207,56.307)
  Bottom Layer w0.166: v1(66.64,24.904) 66.64,25.048 66.345,25.343 66.345,35.245 69.959,38.859 69.959,55.943 70.207,56.192 v1(70.207,56.307)
JTAG_TMS: IC2.A3 R3.1 | length 38
  Top Layer w0.166: IC2.A3@66.315,23.9 66.474,23.74 66.474,23.685 66.952,23.207 v1(66.952,23.151) ; v1(71.3,56.3) 71.96,56.96 R3.1@72.8,56.96
  Bottom Layer w0.166: v1(66.952,23.151) 66.952,24.052 67.193,24.293 67.193,25.178 66.833,25.538 66.833,34.933 70.429,38.529 70.429,55.429 v1(71.3,56.3)
JTAG_TRST_B: IC2.A1 R56.1 | length 39.9
  Top Layer w0.166: IC2.A1@67.729,25.314 67.76,25.314 68.442,24.633 v1(68.474,24.633) ; v1(73.679,56.117) 73.688,56.126 76.746,56.126 77.58,56.96 R56.1@77.6,56.96
  Bottom Layer w0.166: v1(68.474,24.633) 68.474,25.326 67.826,25.974 67.826,34.326 71.38,37.88 71.38,54.423 73.127,56.17 73.627,56.17 v1(73.679,56.117)
LED_0: IC1.47 R1.1 | length 68.2
  Top Layer w0.166: v1(2.998,27.144) 3.063,27.144 3.513,26.694 9.173,26.694 11.549,29.069 40.513,29.069 42,27.583 42,23.2 42.65,22.55 IC1.47@42.65,21.85 ; v1(3.028,6.858) 3.122,6.858 3.86,6.12 R1.1@3.86,6.1
  Bottom Layer w0.166: v1(2.998,27.144) 3.013,27.128 3.013,6.874 v1(3.028,6.858)
LED_1: IC1.46 R6.1 | length 47.4
  Top Layer w0.166: R6.1@3.14,28.06 3.14,28.04 3.347,27.833 3.367,27.833 4,27.2 8.939,27.2 11.186,29.447 40.655,29.447 42.348,27.754 42.348,23.352 43.15,22.55 IC1.46@43.15,21.85
LED_2: IC1.45 R4.1 | length 42.4
  Top Layer w0.166: R4.1@8.34,28 9,28 10.843,29.843 40.753,29.843 42.727,27.869 42.727,23.473 43.65,22.55 IC1.45@43.65,21.85
MDI0_N: IC1.2 J3.10 | length 40.1
  Top Layer w0.123: J3.10@19.77,19.107 20.663,20 21.494,20 23.3,21.806 23.3,25.937 23.372,26.009 25.194,26.009 25.266,25.937 25.266,23.706 25.498,23.474 27.068,23.474 27.3,23.706 27.3,25.898 27.372,25.97 28.855,25.97 28.927,25.898 28.927,23.683 29.159,23.451 30.968,23.451 31.2,23.683 31.2,26.02 31.272,26.092 32.755,26.092 32.827,26.02 32.827,23.683 33.059,23.451 37.772,23.451 40.46,20.763 40.989,20.763 41.103,20.65 IC1.2@41.45,20.65
MDI0_P: IC1.1 J3.11 | length 40
  Top Layer w0.123: J3.11@19.77,21.139 20.636,20.273 21.381,20.273 23.027,21.919 23.027,26.05 23.259,26.282 25.307,26.282 25.539,26.05 25.539,23.819 25.611,23.747 26.955,23.747 27.027,23.819 27.027,26.011 27.259,26.243 28.968,26.243 29.2,26.011 29.2,23.796 29.272,23.724 30.855,23.724 30.927,23.796 30.927,26.133 31.159,26.365 32.868,26.365 33.1,26.133 33.1,23.796 33.172,23.724 37.885,23.724 40.573,21.036 40.989,21.036 41.103,21.15 IC1.1@41.45,21.15
MDI1_N: IC1.5 J3.5 | length 40
  Top Layer w0.123: J3.5@17.23,20.123 17.23,20 16.506,19.276 15.969,19.276 15.63,19.615 15.63,20.13 15.702,20.202 15.897,20.202 15.969,20.274 15.969,20.555 15.897,20.627 15.702,20.627 15.63,20.699 15.63,21.1 15.73,21.2 15.887,21.2 15.959,21.272 15.959,21.528 15.887,21.6 15.698,21.6 15.63,21.668 15.63,22.637 16.24,23.248 17.897,23.248 18.349,22.796 18.349,18.295 19.017,17.627 21.596,17.627 25.784,21.816 30.447,21.816 31.824,20.439 37.275,20.439 38.45,19.263 40.989,19.263 41.103,19.15 IC1.5@41.45,19.15
MDI1_P: IC1.4 J3.4 | length 40
  Top Layer w0.123: J3.4@17.23,18.091 17.23,18.3 16.527,19.003 15.856,19.003 15.357,19.502 15.357,22.75 16.127,23.521 18.011,23.521 18.622,22.909 18.622,18.408 19.13,17.9 21.483,17.9 25.671,22.089 30.56,22.089 31.937,20.712 37.388,20.712 38.563,19.536 40.989,19.536 41.103,19.65 IC1.4@41.45,19.65
MDI2_N: IC1.8 J3.2 | length 40.1
  Top Layer w0.123: J3.2@17.23,14.027 17.23,14.344 17.793,14.906 18.236,14.906 18.63,15.3 18.63,15.8 19.437,16.607 21.407,16.607 24.414,13.6 26.155,13.6 26.227,13.528 26.227,11.932 26.459,11.7 28.068,11.7 28.3,11.932 28.3,13.468 28.372,13.54 29.855,13.54 29.927,13.468 29.927,12.273 30.849,11.351 31.177,11.351 32.699,12.873 32.699,13.201 31.694,14.206 31.694,14.308 32.499,15.113 32.601,15.113 33.593,14.121 33.921,14.121 35.036,15.236 35.036,15.564 34.344,16.256 34.344,16.358 35.199,17.213 35.301,17.213 35.647,16.867 36.063,16.451 36.391,16.451 37.704,17.763 40.989,17.763 41.103,17.65 IC1.8@41.45,17.65
MDI2_P: IC1.7 J3.3 | length 40.1
  Top Layer w0.123: J3.3@17.23,16.059 17.23,15.742 17.793,15.179 18.123,15.179 18.357,15.413 18.357,15.913 19.344,16.9 21.5,16.9 24.527,13.873 26.268,13.873 26.5,13.641 26.5,12.045 26.572,11.973 27.955,11.973 28.027,12.045 28.027,13.581 28.259,13.813 29.968,13.813 30.2,13.581 30.2,12.386 30.962,11.624 31.064,11.624 32.426,12.986 32.426,13.088 32.203,13.31 32.107,13.407 31.421,14.093 31.421,14.421 32.386,15.386 32.714,15.386 33.706,14.394 33.808,14.394 34.763,15.349 34.763,15.451 34.071,16.143 34.071,16.471 35.086,17.486 35.414,17.486 36.176,16.724 36.278,16.724 37.59,18.036 40.989,18.036 41.103,18.15 IC1.7@41.45,18.15
MDI3_N: IC1.11 J3.9 | length 40
  Top Layer w0.123: J3.9@19.77,15.043 19.77,14.754 19.179,14.163 18.707,14.163 18.258,13.714 18.258,8.856 18.587,8.527 24.84,8.527 25.251,8.938 25.251,9.951 25.4,10.1 26.8,10.1 26.927,9.973 26.927,8.259 27.159,8.027 29.113,8.027 29.4,8.314 29.4,9.855 29.472,9.927 30.855,9.927 30.927,9.855 30.927,8.532 31.159,8.3 32.486,8.3 40.45,16.263 40.989,16.263 41.103,16.15 IC1.11@41.45,16.15
MDI3_P: IC1.10 J3.8 | length 40.1
  Top Layer w0.123: J3.8@19.77,13.011 19.77,13.3 19.179,13.89 18.82,13.89 18.531,13.601 18.531,12.356 18.603,12.284 18.783,12.284 18.855,12.212 18.855,11.887 18.783,11.815 18.603,11.815 18.531,11.743 18.531,8.969 18.7,8.8 19.939,8.8 20.011,8.872 20.011,9.046 20.083,9.118 20.365,9.118 20.437,9.046 20.437,8.872 20.509,8.8 24.727,8.8 24.978,9.051 24.978,10.064 25.287,10.373 26.913,10.373 27.2,10.086 27.2,8.372 27.272,8.3 29,8.3 29.127,8.427 29.127,9.968 29.359,10.2 30.968,10.2 31.2,9.968 31.2,8.645 31.272,8.573 32.373,8.573 40.337,16.536 40.989,16.536 41.103,16.65 IC1.10@41.45,16.65
NetC1_2: C1.2 J3.12 | length 4.6
  Top Layer w0.166: v1(19.6,26.8) C1.2@20.3,26.8
  Bottom Layer w0.166: v1(19.6,26.8) 19.6,24.119 20.34,23.379 J3.12@20.34,23.171
NetC2_2: C2.2 J3.6 | length 5.6
  Top Layer w0.166: C2.2@17.8,26.8 v1(18.5,26.8)
  Bottom Layer w0.166: J3.6@17.8,22.155 17.8,22.443 18.5,23.143 v1(18.5,26.8)
NetC3_2: C3.2 J3.1 | length 5.7
  Top Layer w0.166: v1(17,7.3) C3.2@17.7,7.3
  Bottom Layer w0.166: v1(17,7.3) 17,11.107 17.8,11.907 J3.1@17.8,11.995
NetC4_2: C4.2 J3.7 | length 3.7
  Top Layer w0.166: v1(23,10.2) C4.2@23,10.9
  Bottom Layer w0.166: J3.7@20.34,10.979 20.47,10.979 21.249,10.2 v1(23,10.2)
NetC39_2: C39.2 C40.2 C41.1 D1.4 J5.A4-B9 J5.B4-A9 L3.2 | length 13.3
  Top Layer w0.5: J5.B4-A9@6.39,54.4 6.44,54.35 7.35,54.35 v1(8.2,53.5) C39.2@10,53.5 L3.2@12,53.5 12,54.8 11.707,55.093 11.507,55.093 11.25,55.35 D1.4@11.25,55.55 ; J5.A4-B9@6.39,59.2 6.44,59.25 7.307,59.25 v1(7.6,59.543) 7.997,59.94 8.34,59.94 C40.2@8.4,60 8.4,61.8 C41.1@8.9,62.3
NetC47_2: C47.2 C48.2 IC4.14 IC4.15 R34.1 R37.2 | length 10.3
  Top Layer w0.35: R37.2@123.7,62.1 R34.1@123.7,63.7 C48.2@126.1,63.7 C47.2@126.1,61.7 126.426,61.374 126.426,60.695 126.631,60.49 127.113,60.49 ; IC4.15@127.15,59.6 127.15,60.453 127.113,60.49 ; IC4.14@127.8,59.6 127.8,60.285 127.595,60.49 127.113,60.49
NetC53_2: C53.2 C54.2 IC4.8 IC4.9 R43.1 R44.2 | length 12.4
  Top Layer w0.35: IC4.9@131.05,59.6 131.05,60.975 131.6,61.525 C53.2@131.6,61.7 ; IC4.8@131.7,59.6 131.7,61.6 C53.2@131.6,61.7 ; R44.2@133.9,60 133.95,60.05 133.95,61.45 R43.1@134,61.5 134,63.3 133.6,63.7 C54.2@131.6,63.7 C53.2@131.6,61.7
NetC55_2: C55.2 C56.2 IC4.1 IC4.32 R47.1 R48.2 | length 11.7
  Top Layer w0.35: IC4.32@132.35,53.675 132.35,53.362 132.612,53.1 133.925,53.1 134.425,53.6 C55.2@134.6,53.6 ; IC4.1@132.387,55.004 132.792,55.004 133.846,53.95 134.25,53.95 C55.2@134.6,53.6 ; R48.2@134.77,51.3 135.8,51.3 136.1,51.6 R47.1@136.1,51.7 136.1,51.925 136.52,52.345 136.595,52.345 136.8,52.55 C56.2@136.8,53.6 C55.2@134.6,53.6
NetC57_2: C57.2 C58.2 IC4.22 IC4.23 R50.1 R51.2 | length 11.8
  Top Layer w0.35: R51.2@124.3,52.07 124.185,51.955 123.755,51.955 123.3,51.5 R50.1@122.3,51.5 122.3,53.5 C57.2@122.4,53.6 C58.2@124.4,53.6 ; IC4.22@126.462,55.004 126.005,55.004 125.8,54.799 125.8,54.3 125.45,53.95 124.75,53.95 C58.2@124.4,53.6 ; IC4.23@126.5,53.675 126.5,53.366 124.634,53.366 C58.2@124.4,53.6
NetC59_2: C59.2 IC4.25 | length 1.9
  Top Layer w0.35: C59.2@127.1,52.05 127.8,52.75 IC4.25@127.8,53.675
NetD5_1: D5.1 R73.2 R74.2 | length 2.4
  Top Layer w0.2: R73.2@126,7.6 R74.2@126,8.56 127.44,8.56 D5.1@127.45,8.55
NetD7_1: D7.1 R76.2 R77.2 | length 2.4
  Top Layer w0.2: R76.2@126,11.4 R77.2@126,12.3 127.4,12.3 D7.1@127.45,12.25
NetIC1_12: IC1.12 R5.1 | length 3.3
  Top Layer w0.166: R5.1@39.9,13.3 39.9,14.709 40.841,15.65 IC1.12@41.45,15.65
NetIC2_7: IC2.7 R23.2 | length 1.5
  Top Layer w0.166: R23.2@68.5,38.2 68.985,38.2 IC2.7@69.727,37.459
NetIC4_3: IC4.3 R35.1 R42.2 | length 8.6
  Top Layer w0.166: IC4.3@132.387,56.312 133.412,56.312 133.744,56.644 v1(137.906,56.644) 138.48,56.07 R42.2@138.5,56.07 ; v1(137.67,57.93) R35.1@138.4,57.93
  Bottom Layer w0.166: v1(137.67,57.93) 137.67,57.428 137.906,57.192 v1(137.906,56.644)
NetIC4_4: IC4.4 R36.1 R45.2 | length 9.9
  Top Layer w0.166: IC4.4@132.388,56.95 133.354,56.95 133.621,57.217 139.21,57.217 139.308,57.314 139.308,57.738 R36.1@139.5,57.93 ; R45.2@139.5,56.1 139.52,56.1 139.727,56.307 139.727,56.327 139.816,56.416 139.816,57.614 139.727,57.703 139.727,57.723 R36.1@139.52,57.93
NetIC4_6: IC4.6 R44.1 R46.2 | length 4.3
  Top Layer w0.35: IC4.6@132.387,58.27 133.23,58.27 133.325,58.175 133.785,58.175 R46.2@133.9,58.06 134.56,58.06 134.84,58.34 R44.1@134.84,60
NetIC4_18: IC4.18 R37.1 R39.2 R40.2 | length 7.8
  Top Layer w0.35: R37.1@123.7,61.16 123.72,61.16 123.835,61.045 123.835,60.565 v1(123.9,60.5) ; v1(123.9,56.8) R39.2@123.9,57.5 R40.2@124.9,57.5 125.012,57.612 IC4.18@126.462,57.612
  Bottom Layer w0.35: v1(123.9,56.8) v1(123.9,60.5)
NetIC4_24: IC4.24 R51.1 R52.2 | length 4.6
  Top Layer w0.35: R51.1@124.3,51.13 124.415,51.245 124.745,51.245 124.8,51.3 125.455,51.955 125.985,51.955 R52.2@126.1,52.07 126.12,52.07 126.235,52.185 126.235,52.63 126.405,52.8 126.945,52.8 127.15,53.005 IC4.24@127.15,53.675
NetIC4_31: IC4.31 R48.1 R49.2 | length 3.9
  Top Layer w0.35: IC4.31@131.7,53.675 131.7,53.1 132.77,52.03 R49.2@132.77,51.3 R48.1@133.83,51.3
NetJ3_13: J3.13 R1.2 | length 3.7
  Top Layer w0.166: J3.13@4.28,9.555 4.28,7.12 4.8,6.6 R1.2@4.8,6.1
NetJ3_15: J3.15 R4.2 | length 4.4
  Top Layer w0.166: v1(6.5,28) R4.2@7.4,28
  Bottom Layer w0.166: v1(6.5,28) 6.5,27.856 6.82,27.536 J3.15@6.82,24.595
NetJ3_17: J3.17 R6.2 | length 3.7
  Top Layer w0.166: J3.17@1.74,24.595 1.74,27.6 1.973,27.833 1.993,27.833 2.2,28.04 R6.2@2.2,28.06
NetJ4_7: J4.7 R9.1 | length 14.5
  Top Layer w0.166: v1(31.5,37.3) 32.905,37.3 J4.7@33,37.395 ; R9.1@31.56,48.1 31.767,48.307 31.767,48.466 32,48.699 v1(32,48.83)
  Bottom Layer w0.166: v1(31.5,37.3) 31.924,37.724 31.926,37.724 32.1,37.897 32.1,47.6 31.7,48 31.7,48.386 32,48.686 v1(32,48.83)
NetJ5_A5: J5.A5 R14.1 | length 2
  Top Layer w0.166: J5.A5@6.39,58.05 8.38,58.05 R14.1@8.4,58.03
NetJ5_B5: J5.B5 R13.1 | length 2.3
  Top Layer w0.166: J5.B5@6.39,55.05 7.97,55.05 8.48,54.54 R13.1@8.5,54.54
NetR73_1: R73.1 T1.2 | length 6.6
  Top Layer w0.2: T1.2@122.2,10.2 122.9,10.2 123.6,9.5 123.6,7.2 124.14,6.66 R73.1@126,6.66
NetR76_1: R76.1 T1.5 | length 1.7
  Top Layer w0.2: T1.5@124.4,10.2 124.473,10.273 125.175,10.273 125.363,10.46 R76.1@126,10.46
P1V1: C7.2 C8.2 C9.2 C14.2 C15.2 C16.2 C17.2 C18.2 IC1.6 IC1.31 IC1.39 R34.2 | length 23.4
  Top Layer w0.3: C8.2@34.35,18.7 34.51,18.86 34.51,19.21 34.7,19.4 37.164,19.4 37.34,19.224 37.34,18.86 C17.2@37.5,18.7 37.55,18.65 IC1.6@41.45,18.65 ; IC1.39@46.65,21.85 46.65,23.15 C7.2@46.8,23.3 46.96,23.46 47.46,23.46 47.74,23.74 47.74,24.04 C16.2@47.9,24.2 ; IC1.31@48.35,18.65 49.75,18.65 49.96,18.86 49.96,19.09 50.27,19.4 52.157,19.4 52.169,19.388 52.169,18.731 C18.2@52.2,18.7 52.36,18.86 52.36,19.481 v1(52.821,19.481)
  Top Layer w0.5: C16.2@47.9,24.2 51.2,24.2 C14.2@51.6,24.6 51.46,24.74 51.46,25.74 C15.2@51.4,25.8 v1(51.4,26.5)
  other v1: 33.7,18.6 33.7,19.3 52.138,19.463 34.8,24.8 50.6,25.3 34.4,25.4 50.6,26.5 42.9,55.5 42.2,56.3 43.6,56.3 42.9,56.9 42.2,57.6 43.6,57.6 121,60 121.8,60 121,60.8 121.8,60.8
P1V8: C21.2 C22.2 C27.2 C28.2 C29.2 C30.2 IC1.13 IC1.48 R43.2 | length 11.6
  Top Layer w0.3: C28.2@40.2,27 40.116,26.916 40.116,26.516 38.78,25.18 38.78,23.768 39.248,23.3 C29.2@40.1,23.3 C21.2@41.1,23.3 41.26,23.14 41.26,23.04 42.15,22.15 IC1.48@42.15,21.85 ; v1(41,14) C30.2@41,13.3 C22.2@42,13.3 42.15,13.45 IC1.13@42.15,14.95
  other v1: 41,14.7 26.5,27.3 27.3,27.3 38.9,27.3 26,28 26.9,28 27.8,28 38.5,28 39.3,28 21.468,59.811 22.368,59.811 21.468,60.711 22.368,60.711 21.468,61.611 22.368,61.611 135.7,62.8 136.5,62.8 135.7,63.7 136.5,63.7
P2V5: C19.2 C20.2 C23.2 C24.2 C25.2 C26.2 IC1.3 IC1.9 R47.2 | length 13.1
  Top Layer w0.3: C26.2@37.164,14.764 37.164,15.074 37.021,15.216 37.021,15.721 38.5,17.2 38.879,17.2 39.079,17 C20.2@39.4,17 39.721,17 39.871,17.15 IC1.9@41.45,17.15 ; C23.2@37.25,25.8 37.4,25.95 C24.2@37.4,27 ; C25.2@37.664,22.536 37.664,22.437 37.3,22.074 37.3,21.8 39,20.1 39.474,20.1 C19.2@39.674,20.3 ; C19.2@39.9,20.3 40.126,20.3 40.276,20.15 IC1.3@41.45,20.15
  other v1: 129,3 129.9,3 128.3,3.6 129.5,3.7 130.6,3.7 36.8,7 37.8,7 36.3,7.6 37.3,7.6 36.5,14.2 36.4,14.9 36.5,22 36.9,22.6 37,24.8 37.8,24.8 137.4,49.3 138.5,49.3 137.4,50.1 138.5,50.1